# EAGLE board ROV Control 1 (EAGLE 8.3.2)

Size 160 x 100 mm. Coordinates in mm from the lower left corner, seen from the top.
Outline: 0,0 160,0 160,100 0,100 0,0
Outline: 46.99,81.28 46.99,27.94 113.03,27.94 113.03,30.48 115.57,33.02 115.57,66.04 113.03,68.58 113.03,80.01 111.76,81.28 46.99,81.28
Copper layers (1*16): Top 0.035mm / dielectric 1.5mm / Bottom 0.035mm
Design rules "Othermill-DRC-1-64": minimum track width 8mil, minimum drill 0.8mm, track to track 0.39878125mm, track to pad 0.39878125mm, pad to pad 0.39878125mm, via to via 0.39878125mm, smd to smd 0mil, copper to edge 0mil, drill to drill 1mil, minimum pad ring 10mil, minimum via ring 10mil, stop-mask expansion 1mil, vias tented up to drill 30mil, thermal gap 10mil

## Footprints (pad centres in the part's own frame; a part is rotated, then mirrored left to right if it is on the bottom)
2X20_SHROUDED = drill 1.016 pad 1.88: 1 -1.27,24.13; 2 1.27,24.13; 3 -1.27,21.59; 4 1.27,21.59; 5 -1.27,19.05; 6 1.27,19.05; 7 -1.27,16.51; 8 1.27,16.51; 9 -1.27,13.97; 10 1.27,13.97; 11 -1.27,11.43; 12 1.27,11.43; 13 -1.27,8.89; 14 1.27,8.89; 15 -1.27,6.35; 16 1.27,6.35; 17 -1.27,3.81; 18 1.27,3.81; 19 -1.27,1.27; 20 1.27,1.27; 21 -1.27,-1.27; 22 1.27,-1.27; 23 -1.27,-3.81; 24 1.27,-3.81; 25 -1.27,-6.35; 26 1.27,-6.35; 27 -1.27,-8.89; 28 1.27,-8.89; 29 -1.27,-11.43; 30 1.27,-11.43; 31 -1.27,-13.97; 32 1.27,-13.97; 33 -1.27,-16.51; 34 1.27,-16.51; 35 -1.27,-19.05; 36 1.27,-19.05; 37 -1.27,-21.59; 38 1.27,-21.59; 39 -1.27,-24.13; 40 1.27,-24.13
1X03 = drill 1.016 pad 1.88: 1 0,0; 2 2.54,0; 3 5.08,0
0603 = smd 1.1 x 1: 1 -0.85,0; 2 0.85,0
ARDUINOR3-BPLACE = drill 1 pad 1.676 octagon: 3V 35.56,2.54; 5V 38.1,2.54; A0 50.8,2.54; A1 53.34,2.54; A2 55.88,2.54; A3 58.42,2.54; A4 60.96,2.54; A5 63.5,2.54; AREF 23.876,50.8; D0 63.5,50.8; D1 60.96,50.8; D2 58.42,50.8; D3 55.88,50.8; D4 53.34,50.8; D5 50.8,50.8; D6 48.26,50.8; D7 45.72,50.8; D8 41.656,50.8; D9 39.116,50.8; D10 36.576,50.8; D11 34.036,50.8; D12 31.496,50.8; D13 28.956,50.8; GND 26.416,50.8; GND1 43.18,2.54; GND2 40.64,2.54; IOREF 30.48,2.54; RESERVED 27.94,2.54; RESET 33.02,2.54; SCL 18.796,50.8; SDA 21.336,50.8; VIN 45.72,2.54
S4B-ZR = drill 0.7 pad 1.1: 1 -2.25,0; 2 -0.75,0; 3 0.75,0; 4 2.25,0

## Placement (x,y rotation side)
J4  RASPBERRYPI-40-PIN-GPIO_PTH  [2X20_SHROUDED]  81.28,53.34 270 top
J5  [1X03]  10.16,-10.16 0 top  (outside the outline)
J6  [1X03]  10.16,-29.21 0 top  (outside the outline)
J7  [1X03]  10.16,-48.26 0 top  (outside the outline)
R1  10k  [0603]  109.22,73.66 0 top
R2  10k  [0603]  105.41,73.66 0 top
R3  10k  [0603]  101.6,73.66 0 top
R4  1k  [0603]  109.22,69.85 0 top
R5  1k  [0603]  105.41,69.85 0 top
R6  1k  [0603]  101.6,69.85 0 top
U1  ARDUINOR3-BPLACE  [ARDUINOR3-BPLACE]  46.99,27.94 0 top
X1  S4B-ZR  [S4B-ZR]  102.87,36.83 180 top

## Library data of the parts
J4 = SparkFun-Connectors; PROD_ID: CONN-12263; SF_ID: PRT-13054
J5-J7 = SparkFun-Connectors
R1-R3 = SparkFun-Resistors; PROD_ID: RES-00824
R4-R6 = SparkFun-Resistors; PROD_ID: RES-07856
U1 = adafruit
X1 = con-jst; MF: FARNELL; MPN: S4B-ZR(LF)(SN); OC_FARNELL: 9491830; OC_NEWARK: 38K8076

## Nets
3.3V: J4.1 J4.17
3V: U1.3V
5V: J4.2 J4.4 U1.5V
12V: R1.1 R2.1 R3.1
GND: J4.6 J4.9 J4.14 J4.20 J4.25 J4.30 J4.34 J4.39 J5.3 J6.3 J7.3 R4.1 R5.1 R6.1 U1.GND
GND1: U1.GND1
GND2: U1.GND2
N$1: U1.A1 X1.4
N$2: J6.1 U1.D10
N$3: J5.1 U1.D9
N$4: J7.1 U1.D11
N$5: U1.A2 X1.3
N$6: U1.A3 X1.2
N$7: R1.2 R4.2 U1.D5
N$9: R2.2 R5.2 U1.D6
N$10: R3.2 R6.2 U1.D7
VIN: U1.VIN

## Tracks (layer width: path | path; a pad name or v marks a point on that pad's centre or on a via)
3.3V  (1 unrouted)
5V  (2 unrouted)
12V  (2 unrouted)
GND  (14 unrouted)
N$1  (1 unrouted)
N$2  (1 unrouted)
N$3  (1 unrouted)
N$4  (1 unrouted)
N$5  (1 unrouted)
N$6  (1 unrouted)
N$7  (2 unrouted)
N$9  (2 unrouted)
N$10  (2 unrouted)